# Altium PCB PCB2.PcbDoc (part 2 of 2)
Units mil, origin at the board's own origin, x right, y up, seen from the top; angles counter-clockwise.
Board outline 3858.8 x 3858.8 mil, 4 copper layers (Top Layer, signe1, GND, Bottom Layer), stack 23.756 mil thick; 111 components, 78 nets, 389 pads, 281 vias.
Unrouted connection lines stored in the file: 91.
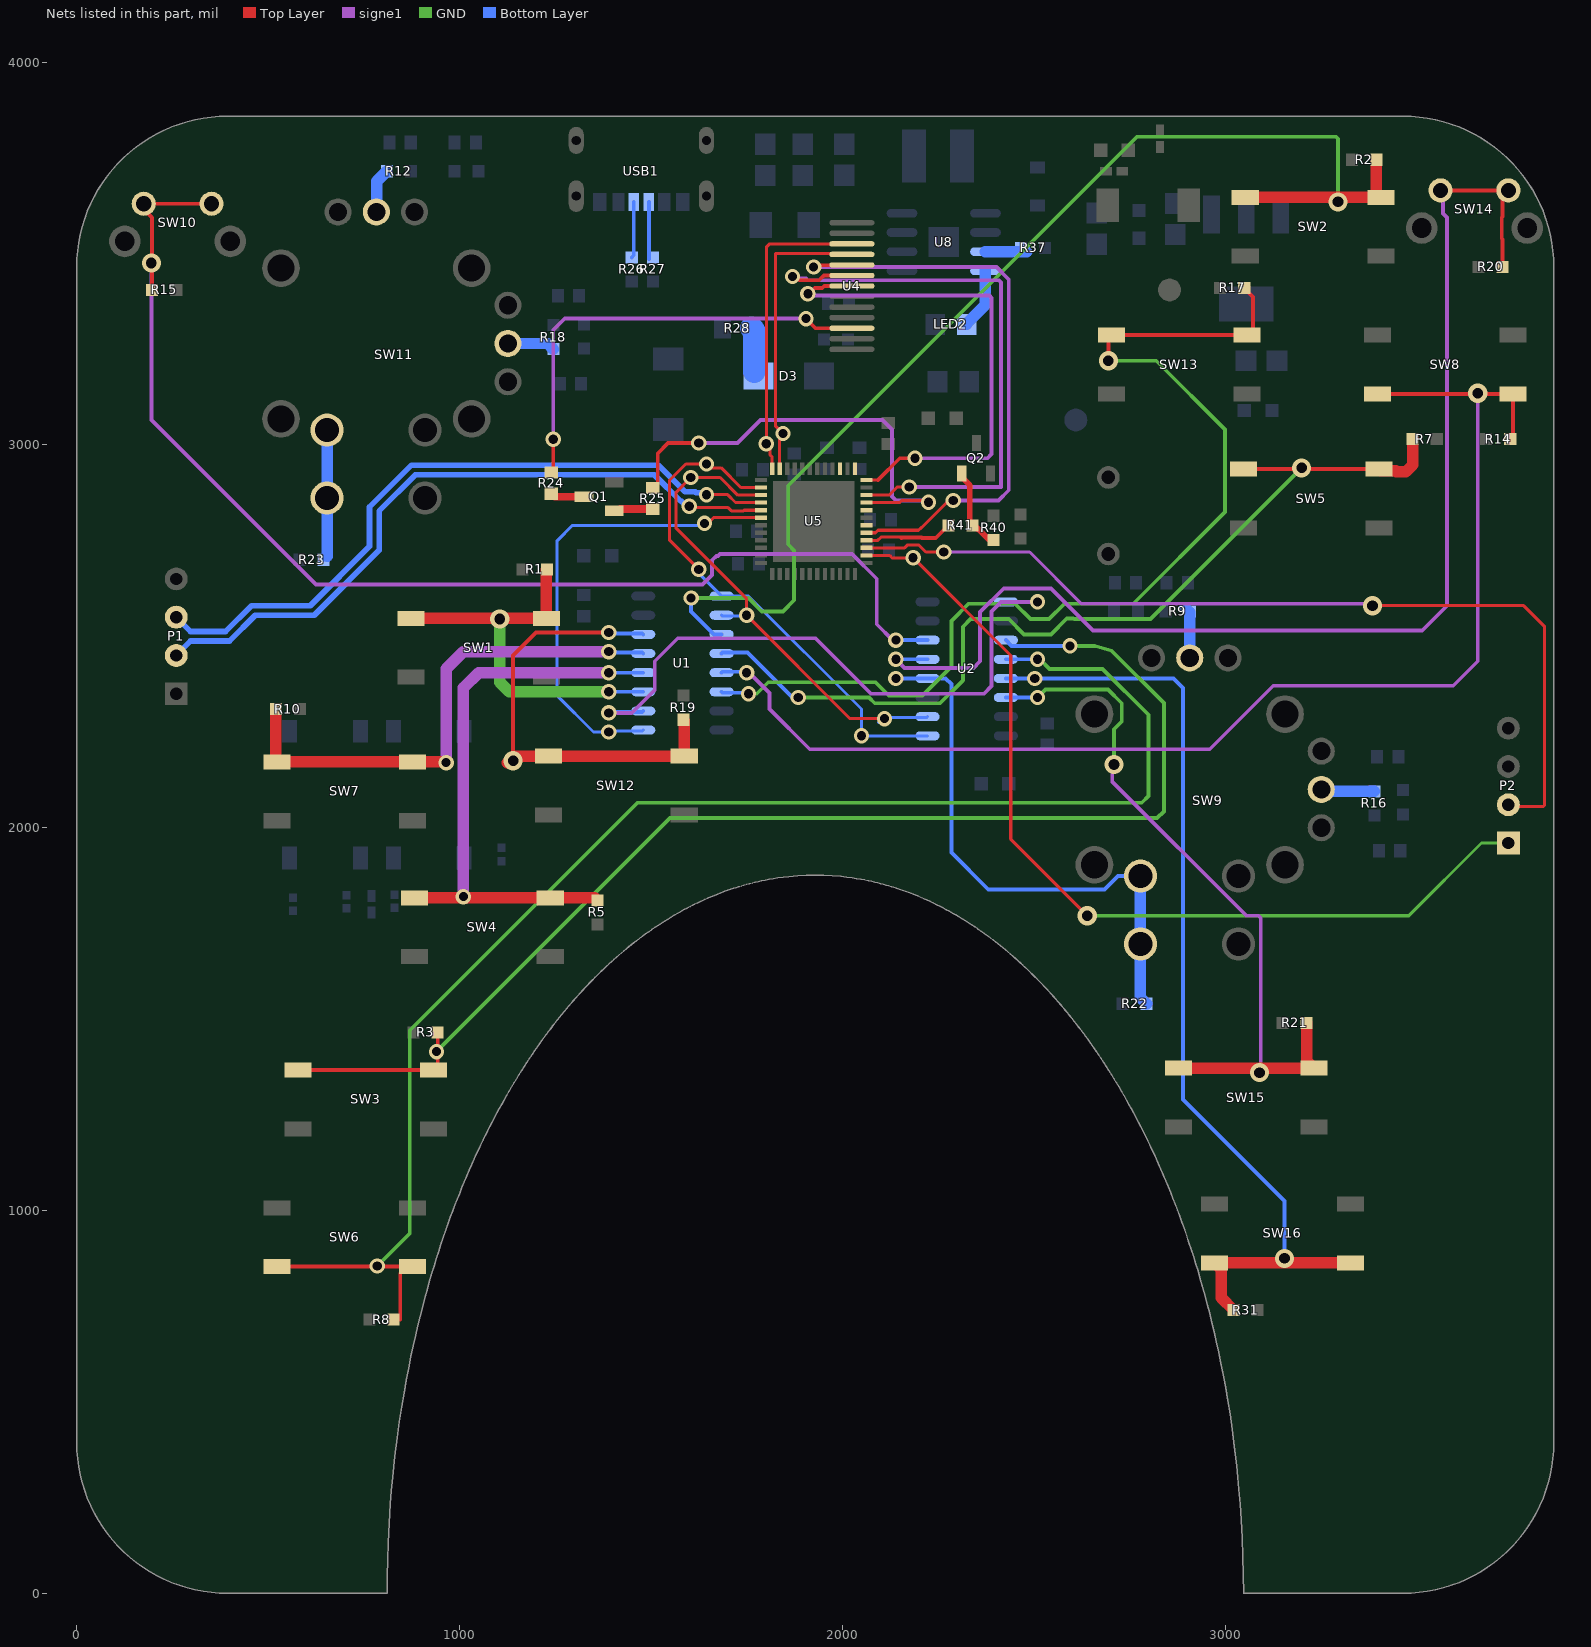
[diagram p4: the nets of this part, all layers, seen from the top]

## Via types
v1: diameter 30, hole 24, Top Layer to Bottom Layer, 153 vias
v2: diameter 40, hole 24, Top Layer to Bottom Layer, 63 vias
v3: diameter 50, hole 28, Top Layer to Bottom Layer, 52 vias
v4: diameter 24.02, hole 12, Top Layer to Bottom Layer, 9 vias
v5: diameter 24, hole 12, Top Layer to Bottom Layer, 4 vias

## Nets (pads, with @x,y where several pads share a name; then routed paths per layer and width w, separated by ;. In a path a pad name is that pad's centre, name@x,y a point inside that pad or via, vN(x,y) a via of type N, cw(c..) or ccw(c..) an arc to the next point about the centre after c; other vN are vias at no path point) (continued)
NetLED2_2: LED2.2 U8.4 | length 160.3
  Bottom Layer w30: LED2.2@2325,3315 2325,3316.95 2374.02,3365.97 U8.4@2374.02,3455
NetP1_2: P1.2 U5.41 | length 1829.9
  Top Layer w8: v2(1600,2840) 1604,2836 1701.85,2836 1710,2827.84 1741.97,2827.84 1743.48,2829.36 1787.02,2829.36 U5.41@1787.2,2829.53
  Bottom Layer w10: v2@1595,2845 v2(1600,2840)
  Bottom Layer w15: P1.2@260,2450 297.5,2487.5 399.11,2487.5 466.61,2555 620.36,2555 790,2724.64 790,2827.53 884.66,2922.19 1508.71,2922.19 1578.4,2852.5 1580.74,2852.5 1593.24,2840 v2(1600,2840)
NetP1_3: P1.3 U5.40 | length 1823.6
  Top Layer w8: v2(1645,2870) 1700.44,2870 1721.04,2849.39 1787.03,2849.39 U5.40@1787.2,2849.22
  Bottom Layer w15: P1.3@260,2550 297.5,2512.5 388.75,2512.5 456.25,2580 610,2580 765,2735 765,2837.89 874.3,2947.19 1519.07,2947.19 1588.76,2877.5 1615.53,2877.5 1618.25,2874.78 1640.22,2874.78 v2(1645,2870)
NetP2_1: P2.1 U5.14 | length 2427
  Top Layer w8: U5.14@2062.79,2711.43 2123.57,2711.43 2130,2705 v2(2185,2705) 2440,2450 2440,1970 v3(2640,1770)
  GND w8: v3(2640,1770) 3480,1770 3670,1960 P2.1@3740,1960
NetP2_2: P2.2 U5.15 | length 2416.4
  Top Layer w8: U5.15@2062.79,2731.11 2163.02,2731.11 2170.92,2739 2199.08,2739 2218.08,2720 v2(2265,2720) ; v3(3385,2580) 3780,2580 3835,2525 3835,2059.69 3830.31,2055 3745,2055 P2.2@3740,2060
  signe1 w8: v2(2265,2720) 2489.33,2720 2624.33,2585 v3@3375,2585
NetQ1_1: Q1.1 R25.1 | length 102.6
  Top Layer w20: Q1.1@1404.37,2827.6 1415.19,2827.6 1420.04,2832.45 R25.1@1505,2832.45
NetQ1_3: Q1.3 R24.1 | length 88.7
  Top Layer w20: R24.1@1240,2872.45 1241.97,2872.45 1249.41,2865 Q1.3@1325.63,2865
NetQ2_1: Q2.1 R40.1 R41.2 | length 214.4
  Top Layer w15: Q2.1@2312,2925 2312,2916.14 2332.99,2895.15 2332.99,2802.01 2382.99,2752.01 R40.1@2395,2752.01
NetR1_2: R1.2 SW1.1 SW1.2 U1.11 | length 1033.3
  Top Layer w10: R1.2@1227.16,2674.17 R1.2@1227.99,2675
  Top Layer w30: SW1.1@872.84,2546.78 SW1.2@1227.16,2546.78 R1.2@1227.16,2674.17
  GND w30: v3(1105,2545) 1105,2380 1130,2355 v2(1390,2355)
  Bottom Layer w10: v2(1390,2355) U1.11@1480,2355
NetR2_2: R2.2 SW2.1 SW2.2 U1.3 | length 3179.7
  Top Layer w10: SW2.2@3395,3658.94 SW2.2@3407.16,3646.78
  Top Layer w30: SW2.1@3052.84,3646.78 SW2.2@3407.16,3646.78 ; SW2.2@3395,3658.94 R2.2@3395,3745
  GND w10: v2(1605,2600) 1754.5,2600 1789.5,2565 1845,2565 1874.14,2594.14 1874.14,2724.47 1858.62,2740 1858.62,2893.62 2770,3805 3290,3805 3295,3800 v3(3295,3635)
  Bottom Layer w10: v2(1605,2600) 1605,2565.02 1665.02,2505 U1.3@1684.73,2505
NetR3_2: R3.2 SW3.1 SW3.2 U2.11 | length 3362.1
  Top Layer w10: SW3.1@577.84,1366.78 SW3.2@932.16,1366.78 ; SW3.2@942.99,1377.6 R3.2@942.99,1465
  GND w10: v2(940,1415) 1550,2025 2822.43,2025 2840,2042.57 2840,2325.81 2703.42,2462.39 2658.96,2475 v2(2595,2475)
  Bottom Layer w10: U2.11@2427.36,2490 2442.37,2475 v2(2595,2475)
NetR5_2: R5.2 SW4.1 SW4.2 U1.12 | length 1511.5
  Top Layer w10: R5.2@1353.22,1816.78 R5.2@1360,1810
  Top Layer w30: SW4.1@882.84,1816.78 SW4.2@1237.16,1816.78 R5.2@1353.22,1816.78
  signe1 w30: v2(1010,1820) 1010,2365 1050,2405 v2(1390,2405)
  Bottom Layer w10: v2(1390,2405) U1.12@1480,2405
NetR7_2: R7.2 SW5.1 SW5.2 U1.4 | length 2461.4
  Top Layer w10: SW5.1@3047.84,2936.78 SW5.2@3402.16,2936.78
  Top Layer w30: SW5.2@3402.16,2936.78 3406.85,2932.09 3445.48,2932.09 3447.57,2930 3472.43,2930 3490,2947.57 R7.2@3490,3015
  GND w10: v2(1885.07,2340) 2069.79,2340 2084.79,2325 2255,2325 2315,2385 2315,2525 2335,2545 2434.79,2545 2474.79,2505 2545.21,2505 2586.36,2546.15 2602.93,2546.15 2606.68,2545 2805,2545 v3(3200,2940)
  Bottom Layer w10: U1.4@1684.73,2455 1687.23,2457.5 1752.5,2457.5 1870,2340 v2(1885.07,2340)
NetR8_2: R8.2 SW6.1 SW6.2 U2.12 | length 3916.2
  Top Layer w10: SW6.2@522.84,853.23 840,853.23 ; 845,715 SW6.1@845,835
  GND w10: v2(785,855) 870,940 870,1470 1465,2065 2782.43,2065 2800,2082.57 2800,2295 2680,2415 2541.36,2415 2516.36,2440 v2(2510,2440)
  Bottom Layer w10: U2.12@2427.36,2440 v2(2510,2440)
NetR9_1: R9.1 SW9.5 | length 136.6
  Bottom Layer w30: R9.1@2895,2575 2907.65,2562.35 SW9.5@2907.65,2443.62
NetR10_2: R10.2 SW7.1 SW7.2 U1.13 | length 1362.3
  Top Layer w10: SW7.1@520,2174.61 SW7.1@522.84,2171.78
  Top Layer w30: SW7.1@520,2174.61 R10.2@520,2310 ; SW7.1@522.84,2171.78 SW7.2@877.16,2171.78 v2@965,2171.78
  signe1 w30: v2(965,2170) 965,2415 1010,2460 v2(1390,2460)
  Bottom Layer w10: v2(1390,2460) 1392.5,2457.5 1477.5,2457.5 U1.13@1480,2455
NetR12_1: R12.1 SW11.5 | length 117.7
  Bottom Layer w30: SW11.5@782.65,3608.62 784.06,3610.03 784.06,3689.06 R12.1@810,3715
NetR14_2: R14.2 SW8.1 SW8.2 U1.5 | length 3360.3
  Top Layer w10: SW8.2@3397.84,3133.22 SW8.1@3752.16,3133.22 3752.16,3022.16 R14.2@3745,3015
  signe1 w10: v2(1750,2405) 1752.71,2405 1762.71,2395 1766.57,2395 1810,2351.57 1810,2310 1915,2205 2960,2205 3125.99,2370.99 3595.99,2370.99 3660,2435 v3(3660,3135)
  Bottom Layer w10: U1.5@1684.73,2405 1687.23,2407.5 1752.5,2407.5 v2(1750,2405)
NetR15_2: R15.2 SW10.1 SW10.2 U2.6 | length 3245.5
  Top Layer w10: R15.2@197.01,3405 197.01,3593.65 175,3615.66 SW10.2@175,3630 SW10.1@352.17,3630
  signe1 w10: v3(195,3475) 195,3065 625,2635 1634.63,2635 1660,2660.37 1660,2698.59 1671.41,2710 1675.21,2710 1680.21,2715 2025.5,2715 2090,2650.5 2090,2531.36 2131.36,2490 v2(2140,2490)
  Bottom Layer w10: v2(2140,2490) U2.6@2222.63,2490
NetR16_1: R16.1 SW9.2 | length 140.7
  Bottom Layer w30: SW9.2@3251.35,2099.92 3255.53,2095.75 3389.25,2095.75 R16.1@3390,2095
NetR17_2: R17.2 SW13.1 SW13.2 U1.6 | length 2801.2
  Top Layer w10: v3(2695,3220) 2695,3278.94 SW13.1@2702.84,3286.78 SW13.2@3057.16,3286.78 3068.73,3286.78 3073.28,3291.33 3073.28,3386.72 R17.2@3050,3410
  GND w10: v2@1765,2350 1776.57,2350 1806.57,2380 2086.36,2380 2121.36,2345 2209.14,2345 2285,2420.86 2285,2540 2330,2585 2451.36,2585 2491.36,2545 2540.21,2545 2580.21,2585 2760,2585 3000,2825 3000,3040 2820,3220 v3(2695,3220)
  Bottom Layer w10: U1.6@1684.73,2355 1687.23,2352.5 1752.5,2352.5 v2(1755,2350)
NetR18_1: R18.1 SW11.2 | length 124.8
  Bottom Layer w30: SW11.2@1126.35,3264.92 1230.08,3264.92 R18.1@1245,3250
NetR19_2: R19.2 SW12.1 SW12.2 U1.14 | length 1207.2
  Top Layer w10: v3@1140,2185 1140,2450 1200,2510 v2(1390,2510) ; R19.2@1585,2282.01 R19.2@1587.16,2279.84
  Top Layer w30: v3@1125,2170 v3@1140,2185 ; v3(1140,2175) v3@1140,2185 ; R19.2@1587.16,2279.84 SW12.2@1587.16,2186.78 SW12.1@1232.84,2186.78 1141.78,2186.78 v3@1140,2185
  Bottom Layer w10: v2(1390,2510) 1392.5,2507.5 1477.5,2507.5 U1.14@1480,2505
NetR20_2: R20.2 SW14.1 SW14.2 U2.5 | length 3242.8
  Top Layer w10: SW14.2@3562.83,3665 SW14.1@3740,3665 3725,3650 3725,3596.18 3722.87,3594.05 3722.87,3539.1 3725,3536.97 R20.2@3725,3465
  signe1 w10: v2(2140,2440) 2162.57,2417.43 2342.43,2417.43 2360,2435 2360,2563.28 2421.72,2625 2545,2625 2655,2515 3515,2515 3579.96,2579.96 3579.96,3594.05 3569.15,3604.87 3569.15,3658.69 SW14.2@3562.83,3665
  Bottom Layer w10: v2(2140,2440) U2.5@2222.63,2440
NetR21_2: R21.2 SW15.1 SW15.2 U2.14 | length 1979.9
  Top Layer w30: SW15.1@2877.84,1371.78 SW15.2@3232.16,1371.78 3212.99,1390.95 R21.2@3212.99,1490
  signe1 w10: v3@2705,2180 2705,2120.93 3055.93,1770 3087.29,1770 3093.15,1764.14 3093.15,1363.15 v3(3090,1360)
  GND w10: v2(2510,2340) 2530.99,2360.99 2694.01,2360.99 2730,2325 2730,2277.32 2710,2257.32 v3(2710,2165)
  Bottom Layer w10: U2.14@2427.36,2340 v2(2510,2340) ; v3(3090,1360) v3@3093.15,1363.15
NetR22_1: R22.1 SW9.a SW9.c U2.4 | length 1562.2
  Bottom Layer w10: SW9.a@2778.94,1873.54 2719.92,1873.54 2685.24,1838.86 2381.14,1838.86 2285,1935 2285,2375 2270,2390 U2.4@2222.63,2390 ; U2.4@2222.63,2390 v2(2140,2390) U2.4@2222.63,2390
  Bottom Layer w30: SW9.a@2778.94,1873.54 SW9.c@2778.94,1696.38 2778.94,1556.06 R22.1@2795,1540
NetR23_1: R23.1 SW11.a SW11.c | length 342.2
  Bottom Layer w10: R23.1@645,2700 R23.1@653.94,2708.94
  Bottom Layer w30: R23.1@653.94,2708.94 SW11.c@653.94,2861.38 SW11.a@653.94,3038.54
NetR24_2: R24.2 U4.11 | length 1177.3
  Top Layer w10: R24.2@1240,2927.56 1245,2932.56 v2(1245,3015) ; v2(1905,3330) 1930.12,3304.88 U4.11@2025,3304.88
  signe1 w10: v2(1245,3015) 1245,3300 1275,3330 v2(1905,3330)
NetR25_2: R25.2 U5.21 | length 1198.3
  Top Layer w8: U5.21@2062.79,2849.22 2149.45,2849.22 2155.23,2855 2220,2855 v2(2225,2850)
  Top Layer w10: R25.2@1505,2887.56 1506.97,2887.56 1517.72,2898.31 1517.72,2977.72 1545,3005 v2(1625,3005)
  signe1 w10: v2(1625,3005) 1726.31,3005 1786.31,3065 2105,3065 2130,3040 2130,2865 2140,2855 2220,2855 v2(2225,2850)
NetR26_2: R26.2 USB1.A5 | length 146.5
  Bottom Layer w10: R26.2@1450,3490 1455.32,3495.32 USB1.A5@1455.32,3634.29
NetR27_2: R27.2 USB1.B5 | length 149.3
  Bottom Layer w10: R27.2@1494.68,3485 USB1.B5@1494.68,3634.29
NetR31_2: R31.2 SW16.1 SW16.2 U2.13 | length 2578
  Top Layer w30: R31.2@3022.01,740 2990,772.01 2990,846.06 SW16.2@2972.84,863.23 SW16.1@3327.16,863.23
  Bottom Layer w10: U2.13@2427.36,2390 v2@2510,2390 ; v2(2502.72,2390) v2@2510,2390 ; v3(3155,875) 3155,1025 2890,1290 2890,2365 2865,2390 v2@2510,2390
NetR37_2: R37.2 U8.3 | length 108
  Bottom Layer w30: U8.3@2374.02,3505 R37.2@2482.01,3505
NetR41_1: R41.1 U5.16 | length 232.1
  Top Layer w8: U5.16@2062.79,2750.8 2092.71,2750.8 2100.92,2759 2155,2759
  Top Layer w10: 2155,2757 2156,2758 2206.95,2758 2207.95,2757 2244.01,2757 R41.1@2277.01,2790
NetU1_1: U1.1 U2.1 U5.38 | length 1361.9
  Top Layer w8: v2(1625,2674.86) 1548,2751.86 1548,2906.79 1591.21,2950 v2(1645,2950) ; v2@1650,2940 1683.54,2940 1734.95,2888.59 U5.38@1787.2,2888.59
  Bottom Layer w8: v2(1625,2674.86) 1625,2664.73 U1.1@1684.73,2605 1755,2605 2050,2310 v2(2050,2240) U2.1@2222.63,2240
NetU1_2: U1.2 U2.2 U5.39 | length 1327.1
  Top Layer w8: U5.39@1787.2,2868.91 1726.99,2868.91 1680.89,2915 v2(1604.29,2915) 1566,2876.71 1566,2781.95 1750,2597.95 v2(1750,2555) 2020,2285 v2(2110,2285)
  Bottom Layer w8: U1.2@1684.73,2555 1687.23,2552.5 1747.5,2552.5 v2(1750,2555) ; v2@2095,2275 2105,2285 v2(2110,2285) 2112.5,2287.5 2220.13,2287.5 U2.2@2222.63,2290
NetU1_9: U1.9 U5.42 | length 1228.4
  Top Layer w8: v2(1640,2795) 1648.66,2795 1663.5,2809.84 U5.42@1787.2,2809.84
  Bottom Layer w8: U1.9@1480,2255 1477.5,2252.5 1392.5,2252.5 v2(1390,2250) 1350,2250 1255,2345 1255,2750 1295,2790 1635,2790 v2(1640,2795)
NetU1_10: U1.10 U2.9 | length 1693.1
  signe1 w10: v2(1390,2300) 1450,2300 1510,2360 1510,2435 1570,2495 1930,2495 2075,2350 2370,2350 2390,2370 2390,2565 2415,2590 v2(2510,2590)
  Bottom Layer w10: v2(1390,2300) 1392.5,2302.5 1477.5,2302.5 U1.10@1480,2305 ; U2.9@2427.36,2590 v2(2510,2590)
NetU4_3: U4.3 U5.36 | length 812.6
  Top Layer w8: U5.36@1816.72,2937.79 1816.72,2968.54 1810.74,2974.53 1810.74,2994.26 1802.2,3002.8 v2(1801.49,3002.8) 1801.49,3516.49 1810.35,3525.35 U4.3@2025,3525.35
NetU4_4: U4.4 U5.35 | length 775
  Top Layer w8: U5.35@1836.41,2937.79 1836.41,3021.41 v2(1845,3030) 1825,3050 1825,3500 2022.8,3500 U4.4@2025,3497.8
NetU4_5: U4.5 U5.17 | length 1594.7
  Top Layer w8: U5.17@2062.79,2770.48 2086.94,2770.48 2093.46,2777 2161.54,2777 2192,2777 2198.92,2777 2205.92,2784 2207.08,2784 2278.08,2855 v2(2290,2855)
  Top Layer w10: v2(1925,3465) 1929.51,3469.51 2024.28,3469.51 U4.5@2025,3470.24
  signe1 w10: v2(1925,3465) 2402.43,3465 2435,3432.43 2435,2881.72 2408.28,2855 v2(2290,2855)
NetU4_6: U4.6 U5.22 | length 1611.1
  Top Layer w8: U5.22@2062.79,2868.91 2122.17,2868.91 2143.26,2890 v2(2175,2890)
  Top Layer w10: v2(1870,3440) 1878.12,3440 1888.12,3430 1939.5,3430 1952.17,3442.68 U4.6@2025,3442.68
  signe1 w10: v2(1870,3440) 1874.5,3435.5 1905,3435.5 1910.5,3430 2409.14,3430 2415,3424.14 2415,2890 v2(2175,2890)
NetU4_7: U4.7 U5.24 | length 1371.3
  Top Layer w8: U5.24@2062.79,2908.28 2093.54,2908.28
  Top Layer w10: v2(1910,3395) 1913.12,3395 1928.12,3410 1947.78,3410 1952.9,3415.12 U4.7@2025,3415.12 ; 2093.54,2908.28 2150.26,2965 v2(2190,2965)
  signe1 w10: v2(1910,3395) 1915,3390 2384.14,3390 2390,3384.14 2390,2975.86 2379.14,2965 v2(2190,2965)
NetU5_18: U5.18
NetU5_20: U5.20
NetU5_25: U5.25
NetU5_27: U5.27
VBUS: D3.2 R28.1 | length 132.5
  Bottom Layer w8: D3.2@1770,3191.27 D3.2@1781.26,3180.01
  Bottom Layer w60: R28.1@1763.04,3305 1770,3298.04 D3.2@1770,3191.27
pads on no net: SW9.7 SW9.8 SW9.9 SW9.10 SW11.7 SW11.8 SW11.9 SW11.10 U2.3 U2.10 U3.2 U4.1 U4.2 U4.9 U4.10 U5.5 U5.6 U5.7 U5.8 U5.28 U5.29 U5.30 U5.31 U5.32 U5.33 U5.34 U5.44 U5.45 U5.47 U5.48 U7.2 U8.9
copper on no net: | length 11028.2
  Top Layer w10: -0.01,3464.82 cw(c393.95,3464.82) 393.95,3858.78 3464.81,3858.78 ; 810.36,-0.02 ccw(c810.36,0.25) 810.54,0.06 ccw(c810.36,0.25) 810.62,0.25 cw(c3950.85,0.29) 813.38,131.97 ; 1273.33,1519.56 1279.31,1526.77 1285.32,1533.91 1291.35,1540.98 1297.4,1547.98 1303.48,1554.91 1309.58,1561.76 1315.7,1568.55 1321.85,1575.26 1328.02,1581.9 1334.21,1588.46 1340.41,1594.95 1346.64,1601.38 1352.89,1607.72 ; 1352.9,1607.73 1359.16,1614 1365.45,1620.2 1371.76,1626.32 1378.09,1632.38 1384.43,1638.35 1390.79,1644.26 1397.17,1650.09 1403.56,1655.84 1409.97,1661.52 1416.4,1667.12 1422.84,1672.65 1429.29,1678.1 1435.76,1683.47 1442.24,1688.77 1448.74,1694 1455.25,1699.15 1461.77,1704.22 1469.94,1710.45 1478.12,1716.57 1486.32,1722.56 1494.54,1728.44 1502.77,1734.2 1511.01,1739.84 1519.27,1745.35 1527.55,1750.76 1535.83,1756.04 1544.12,1761.2 1552.42,1766.24 1560.74,1771.17 1569.05,1775.98 1577.38,1780.66 1585.71,1785.23 1594.05,1789.69 1602.39,1794.02 1610.73,1798.24 1620.76,1803.14 1630.78,1807.88 1640.79,1812.45 1650.82,1816.85 1660.84,1821.09 1670.86,1825.16 1680.87,1829.07 1692.54,1833.42 1704.21,1837.54 1715.87,1841.45 cw(c1942.19,1147.21) 1729.16,1845.64 cw(c1939.88,1154.79) 1742.44,1849.56 cw(c1937.75,1162.3) 1757.36,1853.62 cw(c1935.83,1169.64) 1772.23,1857.33 cw(c1934.16,1176.68) 1788.72,1861.04 cw(c1932.62,1183.95) 1808.42,1864.93 ; 1808.43,1864.94 cw(c1931.28,1191.32) 1831.32,1868.71 ; 1831.33,1868.71 cw(c1930.22,1198.56) 1860.55,1872.38 cw(c1929.43,1206.68) 1929.38,1875.93 cw(c1929.34,1206.78) 1996.59,1872.54 cw(c1928.6,1198.94) 2025.82,1868.95 cw(c1927.57,1191.83) 2048.69,1865.23 cw(c1926.27,1184.57) 2068.4,1861.39 cw(c1924.77,1177.39) 2084.88,1857.72 cw(c1923.13,1170.41) 2099.76,1854.05 cw(c1921.25,1163.15) 2114.66,1850.03 cw(c1919.16,1155.7) 2127.94,1846.15 cw(c1916.88,1148.18) 2141.23,1841.99 2152.89,1838.11 2164.56,1834.02 2176.23,1829.7 2186.24,1825.82 2196.26,1821.78 2206.28,1817.57 2216.3,1813.2 2226.32,1808.65 ; 2226.33,1808.65 2236.34,1803.94 2246.36,1799.07 2254.71,1794.87 2263.05,1790.56 2271.39,1786.13 2279.72,1781.59 2288.05,1776.92 2296.37,1772.14 2304.68,1767.24 2312.99,1762.22 2321.28,1757.08 2329.56,1751.82 2337.84,1746.44 2346.1,1740.95 2354.35,1735.33 2362.58,1729.6 2370.8,1723.75 2379.01,1717.78 2387.2,1711.68 2393.73,1706.73 2400.26,1701.69 2406.78,1696.58 ; 2406.77,1696.58 2413.28,1691.39 2419.76,1686.14 2426.24,1680.79 2432.7,1675.38 2439.15,1669.89 2445.58,1664.33 ; 2445.59,1664.32 2452,1658.69 2458.4,1652.97 2464.79,1647.18 2471.16,1641.32 2477.51,1635.37 ; 2477.51,1635.38 2483.85,1629.36 2490.16,1623.27 2496.46,1617.11 2502.74,1610.87 2509,1604.56 2515.24,1598.18 2521.46,1591.72 2527.66,1585.19 2533.84,1578.59 2540,1571.91 2546.13,1565.16 2552.24,1558.34 2558.33,1551.45 2564.4,1544.49 2570.44,1537.46 2576.46,1530.35 2582.45,1523.18 2588.42,1515.94 2594.36,1508.62 2600.28,1501.24 2606.17,1493.79 2612.03,1486.27 2617.87,1478.68 2623.68,1471.02 2629.45,1463.3 2635.21,1455.51 2640.93,1447.66 2646.63,1439.74 2652.29,1431.75 2657.92,1423.7 2663.53,1415.58 2669.1,1407.4 2676.02,1397.09 2682.89,1386.68 2689.72,1376.17 2696.49,1365.56 2703.2,1354.87 2709.87,1344.07 2716.49,1333.18 2723.05,1322.21 2729.55,1311.14 2736,1299.98 2742.39,1288.73 2748.73,1277.4 2755.01,1265.98 2761.23,1254.47 ; 2761.23,1254.48 2767.4,1242.89 2773.5,1231.22 2779.55,1219.47 2785.53,1207.64 2791.46,1195.73 2797.32,1183.74 2803.13,1171.68 ; 2803.12,1171.68 2808.86,1159.54 2814.54,1147.34 2820.16,1135.06 2825.7,1122.71 2832.28,1107.79 2838.76,1092.78 2845.15,1077.68 2851.44,1062.49 2857.64,1047.2 2863.75,1031.83 2869.75,1016.38 2875.66,1000.84 2881.47,985.22 2887.18,969.53 2892.8,953.76 2899.22,935.28 2905.51,916.69 2911.67,898.02 2917.68,879.27 ; 2935.69,819.82 2941.9,798.03 2947.93,776.15 2953.78,754.2 2959.45,732.18 ; 2959.45,732.17 2965.61,707.33 ; 2965.61,707.32 2971.53,682.4 2977.23,657.41 2983.29,629.58 2989.07,601.69 2995.1,570.96 3001.29,537.38 3007.08,503.78 3012.9,467.37 3018.64,428.18 3024.55,383.43 3030.38,333.22 cw(c-17.83,5.3) 3036.33,272.1 cw(c-49.96,2.51) 3042.28,192.09 cw(c-87.2,0.37) 3048.15,0.37 cw(c-87.2,0.37) 3048.15,0.25 ccw(c3048.41,0.25) 3048.41,-0.02 3464.82,-0.01 ccw(c3464.82,393.95) 3858.78,393.95 3858.78,3464.82
  other v5: 2245.32,3510.31 2284.69,3510.31 2245.32,3549.68 2284.69,3549.68

## Polygon pours and split planes (outlines as drawn)
GND on Bottom Layer "Bottom Layer-GND" (solid, remove dead copper, pour order 87): 559 vertices, not listed, extent -0.01,-0.01 3858.78,3858.78
NetC29_1 on Bottom Layer "Bottom Layer-NetC29_1" (solid, pour order 2): 1730,3365 1710,3385 1710,3740 2060,3740 2070,3750 2070,3830 2225,3830 2225,3675 2215,3665 1865,3665 1840,3640 1840,3365
3.3V on Bottom Layer "Bottom Layer-3.3V 2" (solid, pour order 58): 370,2815 615,2815 615,2635 590,2610 320,2610 320,2765
3.3V on Bottom Layer "Bottom Layer-3.3V 3" (solid, pour order 52): 810,1805 880,1805 885,1800 885,1459.41 520.97,1459.41 510,1470.38 510,1800 655,1800 655,1720 810,1720
3.3V on Bottom Layer "Bottom Layer-3.3V" (solid, pour order 78): 3105,3155 3105,2855 3595,2855 3605,2865 3605,3150 3110,3150
NetC28_2 on Bottom Layer "Bottom Layer-NetC28_2" (solid, pour order 10): 2000,3475 2210,3475 2210,3390 2215,3385 2270,3385 2270,3105 2265,3110 2000,3110
no net on Bottom Layer "Bottom Layer-No Net" (solid, pour order 66): 1730,3345
NetD1_1 on Bottom Layer "Bottom Layer-NetD1_1" (solid, pour order 6): 2280,3595 2280,3655 2290,3665 2365,3665 2365,3835 2360,3840 2250,3840 2250,3650 2110,3650 2110,3595
NetD2_2 on Bottom Layer "Bottom Layer-NetD2_2" (solid, pour order 20): 1400,3615 1400,3735 1560,3735 1560,3560 1685,3560 1695,3550 1695,3275 1715,3275 1720,3270 1720,3145 1460,3145 1455,3150 1455,3305 1530,3305 1535,3310 1535,3575 1520,3575 1515,3580 1515,3685 1435,3685 1430,3690 1430,3605 1400,3605 1395,3610 1395,3630
NetC27_2 on Bottom Layer "Bottom Layer-5.0V 1" (solid, pour order 8): 2330,3635 2405,3635 2410,3640 2410,3665 2710,3665 2715,3660 2715,3570 2455,3570 2445,3580 2445,3590 2330,3590
GND on Top Layer "Top Layer-GND" (solid, remove dead copper, pour order 89): 559 vertices, not listed, extent -0.01,-0.01 3858.78,3858.78
3.3V on Top Layer "Top Layer-3.3V 9" (solid, pour order 38): 2995,3470 3005,3460 3005,3325 2605,3325 2588.42,3341.58 2588.42,3470
3.3V on Top Layer "Top Layer-3.3V 1" (solid, pour order 56): 550,2515 800,2515 800,2275 790,2265 550,2265
3.3V on Top Layer "Top Layer-3.3V 3" (solid, pour order 50): 795,785 795,270.77 757.6,233.38 265,233.38 265,785
3.3V on Top Layer "Top Layer-3.3V 4" (solid, pour order 48): 510,1614 905,1614 905,1415 895,1405 510,1405
3.3V on Top Layer "Top Layer-3.3V 6" (solid, pour order 44): 845,3645 840,3640 840,3380 350,3380 325,3405 325,3480 235,3480 230,3475 230,3245 935,3245 960,3270 955,3275 955,3650 950,3655 945,3650 835,3650
3.3V on Top Layer "Top Layer-3.3V 8" (solid, pour order 40): 2845,1605 2870,1630 2915,1630 3005,1540 3175,1540 3175,1400 3165,1410 2820,1410 2820,1630 2825,1635 2875,1635 2875,1630
3.3V on Top Layer "Top Layer-3.3V 10" (solid, pour order 36): 3530,3090 3695,3090 3705,3080 3705,2965 3540,2965 3530,2975
3.3V on Top Layer "Top Layer-3.3V 11" (solid, pour order 34): 3570,3510 3575,3505 3695,3505 3695,3209.74 3685.26,3200 3480,3200 3480,3510
no net on Mechanical 1 (none): 5,393.95 cw(c-0.01,393.95) -5.03,393.95 -5.03,3464.82 cw(c393.95,3464.82) 393.95,3863.8 cw(c393.95,3858.78) 393.98,3863.8 cw(c393.95,3858.78) 394.02,3863.8 cw(c393.95,3858.78) 394.03,3863.8 394.02,3863.8 cw(c393.95,3858.52) 394.03,3863.8 cw(c393.95,3858.52) 394.1,3863.8 394.02,3863.8 ccw(c393.95,3858.52) 393.98,3863.8 ccw(c393.95,3858.52) 393.95,3863.8 3464.81,3863.8 3464.82,3863.8 ccw(c3464.82,3858.78) 3464.79,3863.8 3464.78,3863.8 cw(c3464.82,3858.52) 3464.82,3863.8 cw(c3464.82,3464.82) 3863.8,3464.82 cw(c3858.78,3464.82) 3863.8,3464.79 3863.8,393.96 3863.8,393.95 ccw(c3858.52,393.95) 3863.8,393.98 ccw(c3858.52,393.95) 3863.8,394.1 3863.8,393.95 cw(c3858.78,393.95) 3853.77,393.89 3853.77,393.95 3853.77,393.82 cw(c3858.78,393.96) 3853.77,393.96 3853.77,3464.82 cw(c3858.78,3464.82) 3853.77,3464.85 ccw(c3464.82,3464.82) 3464.84,3853.77 ccw(c3464.81,3858.78) 3464.95,3853.77 3464.82,3853.77 ccw(c3464.82,3858.78) 3464.88,3853.77 3464.84,3853.77 ccw(c3464.82,3464.82) 3464.82,3853.77 cw(c3464.82,3858.78) 3464.81,3853.77 393.95,3853.77 ccw(c393.95,3858.78) 393.95,3853.77 ccw(c393.95,3464.82) 393.93,3853.77 ccw(c393.95,3464.82) 393.92,3853.77 ccw(c393.95,3464.82) 393.89,3853.77 ccw(c393.95,3464.82) 393.88,3853.77 ccw(c393.95,3464.82) 5,3464.82
GND on signe1 "signe1-GND" (solid, remove dead copper, pour order 91): 559 vertices, not listed, extent -0.01,-0.01 3858.78,3858.78
3.3V on signe1 "signe1-3.3V" (solid, pour order 80): 2650,3825 2655,3820 3260,3820 3260,3475 3315,3420 3550,3420 3550,2985 3520,2955 3515,2960 3265,2960 3235,2990 2935,2990 2875,3050 2875,3295 2555,3295 2515,3335 2515,3595 2660,3595 2655,3600 2655,3825
3.3V on signe1 "signe1-3.3V 1" (solid, pour order 82): 310,2710 485,2710 485,2600 560,2525 790,2525 790,2215 750,2175 705,2175 705,1795 725,1775 1185,1775 1190,1770 1190,1485 410,1485 405,1480 390,1495 390,1995 415,2020 600,2020 600,2305 580,2325 90,2325 90,2380 75,2395 85,2405 310,2405 310,2705
no net on signe1 "signe1-No Net" (solid, pour order 84): 315,2555
GND on GND "GND-GND" (solid, remove dead copper, pour order 93): 559 vertices, not listed, extent -0.01,-0.01 3858.78,3858.78
3.3V on GND "GND-3.3V" (solid, pour order 86): 2865,3780 2870,3775 3250,3775 3250,3595 3265,3580 3390,3580 3605,3365 3605,2645 3595,2635 3335,2635 3335,2370 3320,2355 2975,2355 2975,2620 3185,2830 3185,2835 3230,2880 3230,2885 3240,2895 3240,2990 3135,2990 2850,3275 2850,3760 2865,3775

## Other copper
Top Layer:
  pour cut-out: 2719.99,3762.01 2718.63,3763.36 2716.25,3763.36 2712.88,3760 2713.48,3759.4 2713.48,3735.63 2719.99,3742.14
  pour cut-out: 802.37,223.96 806.35,227.94 806.35,260.78 803.62,260.78 801.52,262.87 762.6,223.96
  pour cut-out: 805.2,742.23 806.68,740.75 829.71,740.75 829.71,835.53 827.3,837.93 804.99,837.93 792.83,825.77 772.89,825.77 760.73,837.93 568.27,837.93 568.27,823.54 477.4,823.54 475,821.14 475,795 798.32,795 804.42,788.9 804.42,785.78 805.2,785
  pour cut-out: 1331.61,1780.35 1334.25,1782.98 1334.25,1787.75 1330.72,1791.29 1282.6,1791.29 1282.6,1787.09 1191.73,1787.09 1191.73,1791.29 1190.45,1790 985,1790 985,1637.06 1122.88,1774.94 1139.59,1774.94 1145,1780.35
  pour cut-out: 545.49,2201.46 545.49,2250.6 546.29,2250.6 550.49,2254.8 794.22,2254.8 805,2265.58 805,2195 570.53,2195 568.27,2197.26 568.27,2201.46
  pour cut-out: 2971.27,747.62 2973.2,747.62 2975.77,750.19 2996.26,729.7 2996.26,714.25 2995.05,715.46 2979.38,715.46 2974.03,736.48
  pour cut-out: 3052.76,763.69 3050.69,765.75 3032.31,765.75 3015.49,782.57 3015.49,834.96 3018.27,837.74 3281.73,837.74 3281.73,833.54 3372.6,833.54 3372.6,892.91 3374.69,895 3420,895 3420,812.2 3408.14,800.35 3095.93,800.35 3084.12,788.53 3076.47,788.53 3052.76,764.81
GND:
  pour cut-out: 3191.06,2909.43 3225.66,2909.43 3229.8,2913.57 3229.8,2893.13 3130,2793.32 3130,2788.32 2956.68,2615 2896.63,2615

## Silkscreen, mask and mechanical layers (free items; w line width, h text height)
Top Overlay:
  drawing of 2252 lines, arcs and shapes, not listed
  text "3.3V" at 2810,3350 h40
  text "GND / RX / TX / 3.3V" at 170,1910 h50
  text "GND / 3.3V / IO26 / IO25" at 3645,1580 h40
  text "CY004-V1-20220422" at 3075,155 h40
Mechanical 1:
  drawing of 737 lines, arcs and shapes, not listed
Mechanical 2:
  drawing of 349 lines, arcs and shapes, not listed

## Text inside footprints (layer, text, board x,y; h text height)
SW9: Top Overlay "VR1" at 3185.02,2151.45 h39.37 r90; Top Overlay "VR2" at 2726.53,2330.39 h39.37
SW11: Top Overlay "VR2" at 601.52,3495.39 h39.37; Top Overlay "VR1" at 1060.02,3316.45 h39.37 r90
U4: Top Overlay "1" at 2055,3645.12 h47.24; Top Overlay "13" at 2065,3225.12 h47.24 r179